# Altium PCB vs1003.PcbDoc (part 2 of 2)
Units mil, origin at the board's own origin, x right, y up, seen from the top; angles counter-clockwise.
Board outline 2510 x 1375 mil, 2 copper layers (Top Layer, Bottom Layer); 54 components, 45 nets, 205 pads, 75 vias.
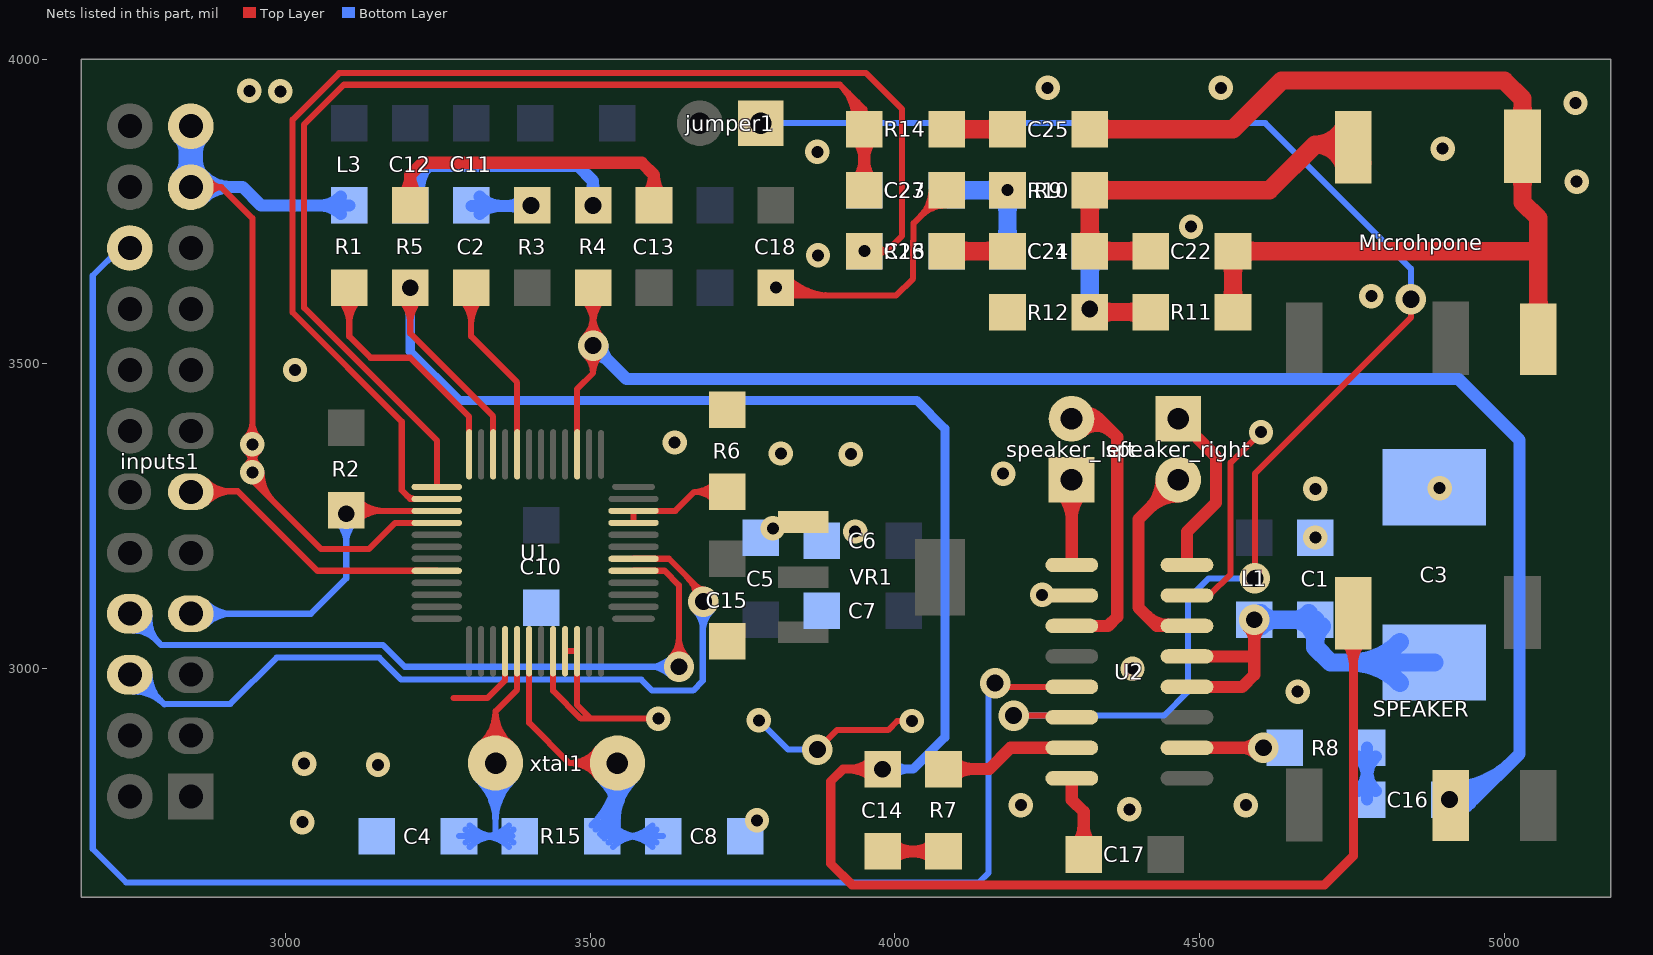
[diagram p2: the nets of this part, all layers, seen from the top]

## Via types
v1: diameter 40, hole 19.68, Top Layer to Bottom Layer, 45 vias
v2: diameter 50, hole 27.56, Top Layer to Bottom Layer, 25 vias
v3: diameter 50, hole 28, Top Layer to Bottom Layer, 5 vias

## Nets (pads, with @x,y where several pads share a name; then routed paths per layer and width w, separated by ;. In a path a pad name is that pad's centre, name@x,y a point inside that pad or via, vN(x,y) a via of type N, cw(c..) or ccw(c..) an arc to the next point about the centre after c; other vN are vias at no path point) (continued)
GND: C1.2 C3.2 C4.1 C5.1 C6.2 C7.1 C8.1 C10.2 C15.2 C18.2 C23.2 C26.1 C27.2 inputs1.21 inputs1.23 L3.1 R6.1 R12.2 U1.4 U1.16 U1.20 U1.21 U1.22 U2.2 U2.15 VR1.2 | length 5102.3
  Top Layer w10: inputs1.21@2845,3790 2895,3790 ; U1.4@3248.58,3239.21 3180.21,3239.21 3137,3196 3059,3196 2946,3309 2946,3739 2895,3790 ; 3276,2952 3332,2952 3360.79,2980.79 U1.16@3360.79,3028.58 ; U1.20@3439.53,3028.58 3439.53,2963.47 3485,2918 3501,2918 ; U1.21@3459.21,3028.58 U1.22@3478.9,3028.58 3478.9,2940.1 3501,2918 ; v1@3601,2918 3501,2918 ; C18.2@3814,3612 4002,3612 4030,3640 4030,3701.13 ; v3(3873,2867) 3905,2899 3989,2899 4004,2914 v1(4028,2914) ; 4030,3663.6 4030,3701.13 ; C27.2@4085,3785 4031,3731 4031,3702.13 4030,3701.13 ; U2.15@4479.49,3120 4516,3120 4551,3155 4551,3338 v1(4601,3388) ; 2895,3790 cw(c2895,3812.21) 2874.7,3803.19 ccw(c2895,3812.21) 2895,3790 ; 2895,3790 ccw(c2895,3767.79) 2874.7,3776.81 cw(c2895,3767.79) 2895,3790 ; v1@2946,3331.79 cw(c2982.21,3331.79) 2956.61,3357.39 ccw(c2982.21,3331.79) v1@2946,3331.79 ; v1@2946,3331.79 ccw(c2909.79,3331.79) 2935.39,3357.39 cw(c2909.79,3331.79) v1@2946,3331.79 ; v1@2946,3358.21 cw(c2909.79,3358.21) 2935.39,3332.61 ccw(c2909.79,3358.21) v1@2946,3358.21 ; v1@2946,3358.21 ccw(c2982.21,3358.21) 2956.61,3332.61 cw(c2982.21,3358.21) v1@2946,3358.21 ; 2946,3404.21 cw(c2909.79,3404.21) 2935.39,3378.61 ccw(c2909.79,3404.21) 2946,3404.21 ; 2946,3404.21 ccw(c2982.21,3404.21) 2956.61,3378.61 cw(c2982.21,3404.21) 2946,3404.21 ; C18.2@3808.54,3628.54 ccw(c3848.46,3668.46) 3848.46,3612 ; C18.2@3808.54,3628.54 ccw(c3848.46,3668.46) 3848.46,3612 ; C18.2@3808.54,3628.54 ccw(c3848.46,3668.46) 3848.46,3612 ; C18.2@3808.54,3628.54 ccw(c3848.46,3668.46) 3848.46,3612 ; C18.2@3815.61,3635.61 ccw(c3872.6,3692.6) 3872.6,3612 ; C18.2@3815.61,3635.61 ccw(c3872.6,3692.6) 3872.6,3612 ; C18.2@3815.61,3635.61 ccw(c3872.6,3692.6) 3872.6,3612 ; C18.2@3815.61,3635.61 ccw(c3872.6,3692.6) 3872.6,3612 ; 4042.32,3742.32 cw(c4085,3699.64) 4085,3760 ccw(c4085,3699.64) 4042.32,3742.32 ; 4042.32,3742.32 ccw(c3999.64,3785) 4060,3785 cw(c3999.64,3785) 4042.32,3742.32 ; C27.2@4059.39,3759.39 cw(c4085,3733.79) 4085,3770 ccw(c4085,3733.79) C27.2@4059.39,3759.39 ; C27.2@4059.39,3759.39 ccw(c4033.79,3785) 4070,3785 cw(c4033.79,3785) C27.2@4059.39,3759.39 ; v1@2951,3322 ccw(c2994.46,3322) 2963.73,3291.27 cw(c2994.46,3322) v1@2951,3322 ; v1@2961,3322 ccw(c3028.6,3322) 2980.8,3274.2 cw(c3028.6,3322) v1@2961,3322 ; C18.2@3801.46,3621.46 ccw(c3824.31,3644.31) 3824.31,3612 cw(c3824.31,3644.31) C18.2@3801.46,3621.46 ; C18.2@3822.68,3607.32 cw(c3833.97,3596.03) 3833.97,3612 ccw(c3833.97,3596.03) C18.2@3822.68,3607.32 ; C18.2@3822.68,3642.68 ccw(c3896.74,3716.74) 3896.74,3612 cw(c3896.74,3716.74) C18.2@3822.68,3642.68
  Bottom Layer w10: v1(3777,2915) 3825,2867 v3(3873,2867)
  Bottom Layer w20: inputs1.21@2845,3790 2930,3790 2960,3760 L3.1@3105,3760 ; 2911.39,3790 cw(c2911.39,3856.39) 2864.45,3809.45 ccw(c2911.39,3856.39) 2911.39,3790 ; 2911.39,3790 ccw(c2911.39,3723.61) 2864.45,3770.55 cw(c2911.39,3723.61) 2911.39,3790 ; 3056.72,3760 cw(c3056.72,3711.72) 3090.86,3745.86 ccw(c3056.72,3711.72) 3056.72,3760 ; 3056.72,3760 ccw(c3056.72,3808.28) 3090.86,3774.14 cw(c3056.72,3808.28) 3056.72,3760
  Bottom Layer w40: inputs1.21@2845,3790 inputs1.23@2845,3890 ; 2845,3832.25 cw(c2802.75,3832.25) 2832.63,3802.37 ccw(c2802.75,3832.25) 2845,3832.25 ; 2845,3832.25 ccw(c2887.25,3832.25) 2857.37,3802.37 cw(c2887.25,3832.25) 2845,3832.25 ; 2845,3847.75 cw(c2887.25,3847.75) 2857.37,3877.63 ccw(c2887.25,3847.75) 2845,3847.75 ; 2845,3847.75 ccw(c2802.75,3847.75) 2832.63,3877.63 cw(c2802.75,3847.75) 2845,3847.75
  other v1: 3028,2748 3774,2751 4385,2769 4207,2776 4576,2776 3152,2842 3031,2844 3612,2918 4661,2962 4390,3000 4242,3121 4690,3215 3935,3225 3800,3230 4690,3295 4894,3296 4178,3320 2946,3322 3928,3352 3813,3353 2946,3368 3639,3371 3016,3490 4782,3611 3805,3625 3874,3678 4486,3725 5119,3799 3873,3848 4899,3853 5117,3928 2992,3947 2941,3948 4251,3953 4535,3953
INL: C14.1 R5.1 SPEAKER.L U1.46 | length 4611.5
  Top Layer w10: v2(3205,3625) 3205,3550 3341.1,3413.9 U1.46@3341.1,3351.42 ; 3205,3564.64 cw(c3265.36,3564.64) 3222.68,3607.32 ccw(c3265.36,3564.64) 3205,3564.64 ; 3205,3564.64 ccw(c3144.64,3564.64) 3187.32,3607.32 cw(c3144.64,3564.64) 3205,3564.64 ; 3205,3576.72 cw(c3253.28,3576.72) 3219.14,3610.86 ccw(c3253.28,3576.72) 3205,3576.72 ; 3205,3576.72 ccw(c3156.72,3576.72) 3190.86,3610.86 cw(c3156.72,3576.72) 3205,3576.72 ; 3205,3588.79 cw(c3241.21,3588.79) 3215.61,3614.39 ccw(c3241.21,3588.79) 3205,3588.79 ; 3205,3588.79 ccw(c3168.79,3588.79) 3194.39,3614.39 cw(c3168.79,3588.79) 3205,3588.79
  Top Layer w15: v2(3980,2835) 3915,2835 3895,2815 3895,2680 3930,2645 4705,2645 4752.44,2692.44 SPEAKER.L@4752.44,3061 ; 3925.68,2835 cw(c3925.68,2780.68) 3964.09,2819.09 ccw(c3925.68,2780.68) 3925.68,2835 ; 3925.68,2835 ccw(c3925.68,2889.32) 3964.09,2850.91 cw(c3925.68,2889.32) 3925.68,2835 ; 3937.75,2835 cw(c3937.75,2792.75) 3967.63,2822.63 ccw(c3937.75,2792.75) 3937.75,2835 ; 3937.75,2835 ccw(c3937.75,2877.25) 3967.63,2847.37 cw(c3937.75,2877.25) 3937.75,2835 ; 4752.44,3006.68 cw(c4806.76,3006.68) 4768.35,3045.09 ccw(c4806.76,3006.68) 4752.44,3006.68 ; 4752.44,3006.68 ccw(c4698.12,3006.68) 4736.53,3045.09 cw(c4698.12,3006.68) 4752.44,3006.68
  Bottom Layer w15: v2@3192.63,3612.63 cw(c3162.75,3582.75) 3205,3582.75 cw(c3247.25,3582.75) v2@3217.37,3612.63 ; v2(3205,3625) 3205,3520 3285,3440 4036,3440 4082.22,3393.78 4082.22,2887.22 4030,2835 v2(3980,2835) ; 4022.25,2835 cw(c4022.25,2877.25) 3992.37,2847.37 ccw(c4022.25,2877.25) 4022.25,2835 ; 4022.25,2835 ccw(c4022.25,2792.75) 3992.37,2822.63 cw(c4022.25,2792.75) 4022.25,2835
INR: C16.2 R4.1 SPEAKER.R U1.39 | length 3919.5
  Top Layer w10: U1.39@3478.9,3351.42 3478.9,3400 3478.9,3458.9 3505,3485 ; R4.1@3505,3625 v2(3505,3530) 3505,3485 ; 3505,3485 cw(c3545.62,3485) 3518.4,3515.15 ccw(c3545.62,3485) 3505,3485 ; 3505,3485 ccw(c3464.38,3485) 3491.6,3515.15 cw(c3464.38,3485) 3505,3485 ; 3505,3564.64 cw(c3565.36,3564.64) 3522.68,3607.32 ccw(c3565.36,3564.64) 3505,3564.64 ; 3505,3564.64 ccw(c3444.64,3564.64) 3487.32,3607.32 cw(c3444.64,3564.64) 3505,3564.64 ; 3505,3578.28 cw(c3456.72,3578.28) 3490.86,3544.14 ccw(c3456.72,3578.28) 3505,3578.28 ; 3505,3578.28 ccw(c3553.28,3578.28) 3519.14,3544.14 cw(c3553.28,3578.28) 3505,3578.28 ; 3505,3588.79 cw(c3541.21,3588.79) 3515.61,3614.39 ccw(c3541.21,3588.79) 3505,3588.79 ; 3505,3588.79 ccw(c3468.79,3588.79) 3494.39,3614.39 cw(c3468.79,3588.79) 3505,3588.79
  Top Layer w20: v2@3505,3525 v2(3505,3530)
  Bottom Layer w20: v2(3505,3530) 3560,3475 4925,3475 5025,3375 5025,2860 4950,2785 ; 3530.61,3504.39 cw(c3556.21,3530) 3520,3530 ccw(c3556.21,3530) 3530.61,3504.39 ; 3530.61,3504.39 ccw(c3505,3478.79) 3505,3515 cw(c3505,3478.79) 3530.61,3504.39 ; v2(4910,2785) ccw(c4910,2881.57) 4978.28,2813.28 cw(c4910,2881.57) v2(4910,2785) ; v2(4910,2785) 4950,2785 ; 4946.21,2785 cw(c4946.21,2821.21) 4920.61,2795.61 ccw(c4946.21,2821.21) 4946.21,2785 ; 4946.21,2785 ccw(c4946.21,2748.79) 4920.61,2774.39 cw(c4946.21,2748.79) 4946.21,2785 ; 4950,2785 cw(c4950,2815) 4926,2797 ccw(c4950,2815) 4950,2785 ; 4950,2785 ccw(c4950,2755) 4926,2773 cw(c4950,2755) 4950,2785 ; C16.2@4910,2765 ccw(c4910,2813.28) 4944.14,2779.14 cw(c4910,2813.28) C16.2@4910,2765 ; C16.2@4910,2805 ccw(c4910,2949.85) 5012.43,2847.43 cw(c4910,2949.85) C16.2@4910,2805
MICN: C26.2 R13.1 U1.2 | length 2293.8
  Top Layer w10: U1.2@3248.58,3278.58 3205.06,3278.58 3191,3292.64 3191,3405.26 3012,3584.26 3012,3900.74 3088.26,3977 3953,3977 4012,3918 4012,3710 3987,3685 ; v1(3950,3685) 3987,3685 ; 3986.21,3685 cw(c3986.21,3721.21) 3960.61,3695.61 ccw(c3986.21,3721.21) 3986.21,3685 ; 3986.21,3685 ccw(c3986.21,3648.79) 3960.61,3674.39 cw(c3986.21,3648.79) 3986.21,3685 ; 3987,3685 cw(c3987,3699.88) 3973.19,3694.33 ccw(c3987,3699.88) 3987,3685 ; 3987,3685 ccw(c3987,3670.12) 3973.19,3675.67 cw(c3987,3670.12) 3987,3685 ; 3199.98,3283.66 ccw(c3212.24,3295.93) 3212.24,3278.58 cw(c3212.24,3295.93) 3199.98,3283.66
MICP: C27.1 R14.1 U1.1 | length 2331.9
  Top Layer w10: U1.1@3248.58,3298.27 3248.58,3374.55 3031,3592.13 3031,3892.87 3096.13,3958 3910,3958 ; 3923.71,3944.29 cw(c3871.53,3892.11) R14.1@3945.02,3885.45 ; R14.1@3934.55,3890.22 ccw(c3849.9,3897.9) 3910,3958 ; 3938.81,3929.19 cw(c3899.22,3889.6) R14.1@3954.98,3884.55 ; R14.1@3950,3885 3950,3890 3950,3918 ; 3910,3958 3950,3918 ; 3950,3918 cw(c3940.72,3918) 3943.23,3909.07 ccw(c3940.72,3918) 3950,3918 ; 3950,3918 ccw(c3959.28,3918) 3956.77,3909.07 cw(c3959.28,3918) 3950,3918
  Top Layer w20: C27.1@3950,3785 R14.1@3950,3885 3950,3890 R14.1@3955,3895 ; 3950,3833.28 cw(c3901.72,3833.28) 3935.86,3799.14 ccw(c3901.72,3833.28) 3950,3833.28 ; 3950,3833.28 ccw(c3998.28,3833.28) 3964.14,3799.14 cw(c3998.28,3833.28) 3950,3833.28 ; 3950,3836.72 cw(c3998.28,3836.72) 3964.14,3870.86 ccw(c3998.28,3836.72) 3950,3836.72 ; 3950,3836.72 ccw(c3901.72,3836.72) 3935.86,3870.86 cw(c3901.72,3836.72) 3950,3836.72
MUTE: inputs1.20 U2.5 | length 2981.9
  Top Layer w10: v3(4164.56,2976) 4170.56,2970 U2.5@4290.51,2970
  Bottom Layer w10: inputs1.20@2745,3690 2729,3690 2684,3645 2684,2704 2739,2649 4138,2649 4154,2665 4154,2971 4167,2984 4167,2978.44 v3(4164.56,2976)
NetC2_1: C2.1 U1.44 | length 608.2
  Top Layer w10: C2.1@3305,3625 3305,3545 3380.47,3469.53 U1.44@3380.47,3351.42 ; 3305,3564.64 cw(c3365.36,3564.64) 3322.68,3607.32 ccw(c3365.36,3564.64) 3305,3564.64 ; 3305,3564.64 ccw(c3244.64,3564.64) 3287.32,3607.32 cw(c3244.64,3564.64) 3305,3564.64 ; 3305,3588.79 cw(c3341.21,3588.79) 3315.61,3614.39 ccw(c3341.21,3588.79) 3305,3588.79 ; 3305,3588.79 ccw(c3268.79,3588.79) 3294.39,3614.39 cw(c3268.79,3588.79) 3305,3588.79
NetC4_2: C4.2 R15.1 U1.17 xtal1.2 | length 1569.1
  Top Layer w10: xtal1.2@3319.49,2876.17 ccw(c3275.46,2929.99) 3345,2929.99 ; xtal1.2@3325.82,2868.43 ccw(c3292.72,2908.89) 3345,2908.89 ccw(c3397.27,2908.89) xtal1.2@3364.17,2868.43 ; xtal1.2@3345,2845 3345,2930 ; xtal1.2@3370.5,2876.17 cw(c3414.54,2929.99) 3345,2929.99 ; U1.17@3380.47,3028.58 3380.47,2965.47 3345,2930
  Bottom Layer w10: C4.2@3285,2725 R15.1@3373,2725 ; xtal1.2@3316.52,2816.52 cw(c3247.76,2747.77) 3345,2747.77 cw(c3442.23,2747.77) xtal1.2@3373.48,2816.52 ; xtal1.2@3323.59,2823.59 cw(c3271.9,2771.91) 3345,2771.91 cw(c3418.09,2771.91) xtal1.2@3366.4,2823.59 ; xtal1.2@3330.66,2830.66 cw(c3296.05,2796.05) 3345,2796.05 cw(c3393.95,2796.05) xtal1.2@3359.33,2830.66 ; 3345,2729 xtal1.2@3345,2845 ; 3321.21,2725 cw(c3321.21,2761.21) 3295.61,2735.61 ccw(c3321.21,2761.21) 3321.21,2725 ; 3321.21,2725 ccw(c3321.21,2688.79) 3295.61,2714.39 cw(c3321.21,2688.79) 3321.21,2725 ; 3324.64,2725 cw(c3324.64,2664.64) 3367.32,2707.32 ccw(c3324.64,2664.64) 3324.64,2725 ; 3324.64,2725 ccw(c3324.64,2785.36) 3367.32,2742.68 cw(c3324.64,2785.36) 3324.64,2725 ; 3345.36,2725 cw(c3345.36,2785.36) 3302.68,2742.68 ccw(c3345.36,2785.36) 3345.36,2725 ; 3345.36,2725 ccw(c3345.36,2664.64) 3302.68,2707.32 cw(c3345.36,2664.64) 3345.36,2725 ; 3348.79,2725 cw(c3348.79,2688.79) 3374.39,2714.39 ccw(c3348.79,2688.79) 3348.79,2725 ; 3348.79,2725 ccw(c3348.79,2761.21) 3374.39,2735.61 cw(c3348.79,2761.21) 3348.79,2725
NetC8_2: C8.2 R15.2 U1.18 xtal1.1 | length 2031.8
  Top Layer w10: U1.18@3400.16,3028.58 3400.16,2910.84 3466,2845 ; xtal1.1@3512.4,2821.34 ccw(c3466,2787.67) 3466,2845 ; xtal1.1@3512.4,2868.66 cw(c3466,2902.33) 3466,2845 ; xtal1.1@3520.49,2827.22 ccw(c3485.62,2801.91) 3485.62,2845 ccw(c3485.62,2888.09) xtal1.1@3520.49,2862.78 ; xtal1.1@3545,2845 3466,2845
  Bottom Layer w10: R15.2@3502.4,2742.75 ccw(c3401,2844.99) xtal1.1@3545,2845 3545,2727 R15.2@3543,2725 ; R15.2@3509.44,2735.65 ccw(c3424.81,2820.99) xtal1.1@3545,2820.99 ; R15.2@3516.48,2728.55 ccw(c3448.61,2796.99) 3545,2796.99 ; xtal1.1@3516.52,2816.52 cw(c3447.76,2747.77) 3545,2747.77 cw(c3642.23,2747.77) xtal1.1@3573.48,2816.52 ; R15.2@3520,2725 R15.2@3543,2725 ; R15.2@3523.52,2721.45 ccw(c3472.41,2772.99) 3545,2772.99 ; xtal1.1@3523.59,2823.59 cw(c3471.9,2771.91) 3545,2771.91 cw(c3618.09,2771.91) xtal1.1@3566.4,2823.59 ; R15.2@3530.56,2714.35 ccw(c3496.21,2748.99) R15.2@3545,2748.99 ; xtal1.1@3530.66,2830.66 cw(c3496.05,2796.05) 3545,2796.05 cw(c3593.95,2796.05) xtal1.1@3559.33,2830.66 ; C8.2@3620,2725 R15.2@3543,2725 ; 3556.21,2725 cw(c3556.21,2761.21) 3530.61,2735.61 ccw(c3556.21,2761.21) 3556.21,2725 ; 3556.21,2725 ccw(c3556.21,2688.79) 3530.61,2714.39 cw(c3556.21,2688.79) 3556.21,2725 ; 3559.64,2725 cw(c3559.64,2664.64) 3602.32,2707.32 ccw(c3559.64,2664.64) 3559.64,2725 ; 3559.64,2725 ccw(c3559.64,2785.36) 3602.32,2742.68 cw(c3559.64,2785.36) 3559.64,2725 ; 3580.36,2725 cw(c3580.36,2785.36) 3537.68,2742.68 ccw(c3580.36,2785.36) 3580.36,2725 ; 3580.36,2725 ccw(c3580.36,2664.64) 3537.68,2707.32 cw(c3580.36,2664.64) 3580.36,2725 ; 3583.79,2725 cw(c3583.79,2688.79) 3609.39,2714.39 ccw(c3583.79,2688.79) 3583.79,2725 ; 3583.79,2725 ccw(c3583.79,2761.21) 3609.39,2735.61 cw(c3583.79,2761.21) 3583.79,2725
NetC9_1: 
NetC11_1: C11.1 R3.1 | length 366.3
  Top Layer w10: v2(3403,3760) R3.1@3405,3760
  Bottom Layer w10: C11.1@3305,3760 C11.1@3306,3759 ; v2@3402,3759 v2(3403,3760)
  Bottom Layer w20: C11.1@3306,3759 v2@3402,3759 ; C11.1@3319.14,3745.86 cw(c3350.87,3714.13) 3350.87,3759 ccw(c3350.87,3714.13) C11.1@3319.14,3745.86 ; C11.1@3319.14,3774.14 ccw(c3355.7,3810.7) 3355.7,3759 cw(c3355.7,3810.7) C11.1@3319.14,3774.14 ; 3364.37,3759 ccw(c3364.37,3798.63) 3392.39,3770.61 cw(c3364.37,3798.63) 3364.37,3759 ; 3369.2,3759 cw(c3369.2,3726.2) 3392.39,3749.39 ccw(c3369.2,3726.2) 3369.2,3759
NetC12_1: C12.1 R4.2 | length 815.9
  Bottom Layer w20: v2(3505,3760) 3505,3800 3480,3825 3235,3825 ; C12.1@3205,3760 cw(c3242.24,3775.3) 3213.77,3803.77 ccw(c3242.24,3775.3) C12.1@3205,3760 ; C12.1@3205,3760 3205,3795 ; 3205,3795 cw(c3184.38,3795) 3194.85,3777.23 ccw(c3184.38,3795) 3205,3795 ; 3205,3795 ccw(c3225.62,3795) 3215.15,3777.23 cw(c3225.62,3795) 3205,3795 ; 3205,3795 3235,3825 ; 3235,3825 ccw(c3272.33,3787.67) 3223.5,3767.6 cw(c3272.33,3787.67) 3235,3825 ; 3505,3796.21 cw(c3468.79,3796.21) 3494.39,3770.61 ccw(c3468.79,3796.21) 3505,3796.21 ; 3505,3796.21 ccw(c3541.21,3796.21) 3515.61,3770.61 cw(c3541.21,3796.21) 3505,3796.21
NetC13_1: C13.1 R5.2 | length 829.9
  Top Layer w20: R5.2@3205,3760 3205,3810 3225,3830 3585,3830 3605,3810 C13.1@3605,3760 C13.1@3615,3760 ; 3205,3808.28 cw(c3156.72,3808.28) 3190.86,3774.14 ccw(c3156.72,3808.28) 3205,3808.28 ; 3205,3808.28 ccw(c3253.28,3808.28) 3219.14,3774.14 cw(c3253.28,3808.28) 3205,3808.28 ; 3605,3808.28 cw(c3556.72,3808.28) 3590.86,3774.14 ccw(c3556.72,3808.28) 3605,3808.28 ; 3605,3808.28 ccw(c3653.28,3808.28) 3619.14,3774.14 cw(c3653.28,3808.28) 3605,3808.28
NetC14_2: C14.2 R7.2 | length 403.4
  Top Layer w20: C14.2@3980,2700 R7.2@4080,2700 ; 4028.28,2700 cw(c4028.28,2748.28) 3994.14,2714.14 ccw(c4028.28,2748.28) 4028.28,2700 ; 4028.28,2700 ccw(c4028.28,2651.72) 3994.14,2685.86 cw(c4028.28,2651.72) 4028.28,2700 ; 4031.72,2700 cw(c4031.72,2651.72) 4065.86,2685.86 ccw(c4031.72,2651.72) 4031.72,2700 ; 4031.72,2700 ccw(c4031.72,2748.28) 4065.86,2714.14 cw(c4031.72,2748.28) 4031.72,2700
NetC16_1: C16.1 R8.1 | length 388.4
  Bottom Layer w20: C16.1@4775,2785 R8.1@4775,2870 ; 4775,2821.72 cw(c4823.28,2821.72) 4789.14,2855.86 ccw(c4823.28,2821.72) 4775,2821.72 ; 4775,2821.72 ccw(c4726.72,2821.72) 4760.86,2855.86 cw(c4726.72,2821.72) 4775,2821.72 ; 4775,2833.28 cw(c4726.72,2833.28) 4760.86,2799.14 ccw(c4726.72,2833.28) 4775,2833.28 ; 4775,2833.28 ccw(c4823.28,2833.28) 4789.14,2799.14 cw(c4823.28,2833.28) 4775,2833.28
NetC17_2: C17.2 U2.8 | length 284.8
  Top Layer w20: U2.8@4290.51,2820 4290.51,2784.49 4310,2765 C17.2@4310,2695 ; 4310,2743.28 cw(c4261.72,2743.28) 4295.86,2709.14 ccw(c4261.72,2743.28) 4310,2743.28 ; 4310,2743.28 ccw(c4358.28,2743.28) 4324.14,2709.14 cw(c4358.28,2743.28) 4310,2743.28
NetC21_1: C21.1 C23.1 R9.2 R10.1 | length 882.6
  Bottom Layer w30: C23.1@4085,3785 4125,3785 v1(4185,3785) C21.1@4185,3685 ; C23.1@4095.61,3774.39 cw(c4121.21,3748.79) 4121.21,3785 ; C23.1@4095.61,3774.39 cw(c4121.21,3748.79) 4121.21,3785 ; C23.1@4095.61,3774.39 cw(c4121.21,3748.79) 4121.21,3785 ; C23.1@4095.61,3774.39 cw(c4121.21,3748.79) 4121.21,3785 ; C23.1@4095.61,3774.39 cw(c4121.21,3748.79) 4121.21,3785 ; C23.1@4095.61,3774.39 cw(c4121.21,3748.79) 4121.21,3785 ; C23.1@4095.61,3795.61 ccw(c4121.21,3821.21) 4121.21,3785 ; C23.1@4095.61,3795.61 ccw(c4121.21,3821.21) 4121.21,3785 ; C23.1@4095.61,3795.61 ccw(c4121.21,3821.21) 4121.21,3785 ; C23.1@4095.61,3795.61 ccw(c4121.21,3821.21) 4121.21,3785 ; C23.1@4095.61,3795.61 ccw(c4121.21,3821.21) 4121.21,3785 ; C23.1@4095.61,3795.61 ccw(c4121.21,3821.21) 4121.21,3785 ; 4148.79,3785 cw(c4148.79,3748.79) R9.2@4174.39,3774.39 ; 4148.79,3785 ccw(c4148.79,3821.21) 4174.39,3795.61 cw(c4148.79,3821.21) 4148.79,3785 ; 4148.79,3785 cw(c4148.79,3748.79) R9.2@4174.39,3774.39 ; R9.2@4174.39,3774.39 cw(c4148.79,3748.79) 4185,3748.79 ; R9.2@4174.39,3774.39 cw(c4148.79,3748.79) 4185,3748.79 ; 4185,3721.21 cw(c4148.79,3721.21) 4174.39,3695.61 ccw(c4148.79,3721.21) 4185,3721.21 ; 4185,3721.21 ccw(c4221.21,3721.21) 4195.61,3695.61 cw(c4221.21,3721.21) 4185,3721.21 ; 4185,3748.79 cw(c4221.21,3748.79) 4195.61,3774.39 ccw(c4221.21,3748.79) 4185,3748.79
NetC21_2: C21.2 R11.2 R12.1 | length 606
  Top Layer w30: v2(4320,3590) R12.1@4320,3585 R11.2@4420,3585 ; 4356.21,3585 cw(c4356.21,3626.21) 4327.07,3597.07 ccw(c4356.21,3626.21) 4356.21,3585 ; 4356.21,3585 cw(c4356.21,3621.21) 4330.61,3595.61 ccw(c4356.21,3621.21) 4356.21,3585 ; 4356.21,3585 ccw(c4356.21,3548.79) 4330.61,3574.39 cw(c4356.21,3548.79) 4356.21,3585 ; 4383.79,3585 cw(c4383.79,3548.79) 4409.39,3574.39 ccw(c4383.79,3548.79) 4383.79,3585 ; 4383.79,3585 ccw(c4383.79,3621.21) 4409.39,3595.61 cw(c4383.79,3621.21) 4383.79,3585
  Bottom Layer w30: v2(4320,3590) C21.2@4320,3685 ; 4320,3648.79 cw(c4356.21,3648.79) 4330.61,3674.39 ccw(c4356.21,3648.79) 4320,3648.79 ; 4320,3648.79 ccw(c4283.79,3648.79) 4309.39,3674.39 cw(c4283.79,3648.79) 4320,3648.79
NetC22_1: C22.1 C24.1 Microhpone.L R10.2 | length 1606
  Top Layer w30: C24.1@4310,3680 C24.1@4320,3690 ; C22.1@4420,3685 4325,3685 C24.1@4320,3690 ; Microhpone.L@4755,3860 4690,3860 ; C24.1@4320,3690 R10.2@4320,3785 4615,3785 4690,3860 ; 4320,3721.21 cw(c4283.79,3721.21) 4309.39,3695.61 ccw(c4283.79,3721.21) 4320,3721.21 ; 4320,3721.21 ccw(c4356.21,3721.21) C24.1@4330.61,3695.61 ; 4320,3721.21 ccw(c4356.21,3721.21) C24.1@4330.61,3695.61 ; 4320,3748.79 cw(c4356.21,3748.79) R10.2@4330.61,3774.39 ; 4320,3748.79 ccw(c4283.79,3748.79) 4309.39,3774.39 cw(c4283.79,3748.79) 4320,3748.79 ; 4320,3748.79 cw(c4356.21,3748.79) R10.2@4330.61,3774.39 ; C24.1@4330.61,3695.61 ccw(c4356.21,3721.21) 4356.21,3685 ; C24.1@4330.61,3695.61 ccw(c4356.21,3721.21) 4356.21,3685 ; R10.2@4330.61,3774.39 cw(c4356.21,3748.79) 4356.21,3785 ; R10.2@4330.61,3774.39 cw(c4356.21,3748.79) 4356.21,3785 ; 4356.21,3685 ccw(c4356.21,3648.79) 4330.61,3674.39 cw(c4356.21,3648.79) 4356.21,3685 ; 4356.21,3785 cw(c4356.21,3821.21) 4330.61,3795.61 ccw(c4356.21,3821.21) 4356.21,3785 ; 4383.79,3685 cw(c4383.79,3648.79) 4409.39,3674.39 ccw(c4383.79,3648.79) 4383.79,3685 ; 4383.79,3685 ccw(c4383.79,3721.21) 4409.39,3695.61 cw(c4383.79,3721.21) 4383.79,3685 ; 4690,3860 ccw(c4690,3913.73) 4738.81,3891.27 cw(c4690,3913.73) 4690,3860 ; 4690,3860 cw(c4690,3810.72) 4737.87,3822.43 ccw(c4690,3810.72) 4690,3860 ; Microhpone.L@4728.23,3860 cw(c4728.23,3820.07) 4767.01,3829.57 ccw(c4728.23,3820.07) Microhpone.L@4728.23,3860
NetC22_2: C22.2 C25.1 Microhpone.G R11.1 | length 3019.8
  Top Layer w30: C25.1@4320,3885 4555,3885 4635,3965 4900,3965 5000,3965 5030,3935 Microhpone.G@5030,3887 ; R11.1@4555,3585 C22.2@4555,3685 5030,3685 5056,3685 ; Microhpone.G@5030,3865 Microhpone.G@5030,3827 5030,3765 5056,3739 5056,3685 ; Microhpone.G@5056,3512 Microhpone.G@5056,3569 5056,3685 ; 4356.21,3885 cw(c4356.21,3921.21) 4330.61,3895.61 ccw(c4356.21,3921.21) 4356.21,3885 ; 4356.21,3885 ccw(c4356.21,3848.79) 4330.61,3874.39 cw(c4356.21,3848.79) 4356.21,3885 ; 4555,3621.21 cw(c4518.79,3621.21) 4544.39,3595.61 ccw(c4518.79,3621.21) 4555,3621.21 ; 4555,3621.21 ccw(c4591.21,3621.21) 4565.61,3595.61 cw(c4591.21,3621.21) 4555,3621.21 ; 4555,3648.79 cw(c4591.21,3648.79) C22.2@4565.61,3674.39 ; 4555,3648.79 ccw(c4518.79,3648.79) 4544.39,3674.39 cw(c4518.79,3648.79) 4555,3648.79 ; 4555,3648.79 cw(c4591.21,3648.79) C22.2@4565.61,3674.39 ; C22.2@4565.61,3674.39 cw(c4591.21,3648.79) 4591.21,3685 ; C22.2@4565.61,3674.39 cw(c4591.21,3648.79) 4591.21,3685 ; 4591.21,3685 cw(c4591.21,3721.21) 4565.61,3695.61 ccw(c4591.21,3721.21) 4591.21,3685 ; 5030,3790.79 cw(c5066.21,3790.79) 5040.61,3816.39 ccw(c5066.21,3790.79) 5030,3790.79 ; 5030,3790.79 ccw(c4993.79,3790.79) 5019.39,3816.39 cw(c4993.79,3790.79) 5030,3790.79 ; Microhpone.G@5030,3850.79 cw(c5066.21,3850.79) 5040.61,3876.39 ccw(c5066.21,3850.79) Microhpone.G@5030,3850.79 ; Microhpone.G@5030,3850.79 ccw(c4993.79,3850.79) 5019.39,3876.39 cw(c4993.79,3850.79) Microhpone.G@5030,3850.79 ; Microhpone.G@5030,3863.21 cw(c4993.79,3863.21) 5019.39,3837.61 ccw(c4993.79,3863.21) Microhpone.G@5030,3863.21 ; Microhpone.G@5030,3863.21 ccw(c5066.21,3863.21) 5040.61,3837.61 cw(c5066.21,3863.21) Microhpone.G@5030,3863.21 ; 5030,3923.21 cw(c4993.79,3923.21) 5019.39,3897.61 ccw(c4993.79,3923.21) 5030,3923.21 ; 5030,3923.21 ccw(c5066.21,3923.21) 5040.61,3897.61 cw(c5066.21,3923.21) 5030,3923.21 ; Microhpone.G@5056,3532.79 cw(c5092.21,3532.79) 5066.61,3558.39 ccw(c5092.21,3532.79) Microhpone.G@5056,3532.79 ; Microhpone.G@5056,3532.79 ccw(c5019.79,3532.79) 5045.39,3558.39 cw(c5019.79,3532.79) Microhpone.G@5056,3532.79 ; Microhpone.G@5056,3548.21 cw(c5019.79,3548.21) 5045.39,3522.61 ccw(c5019.79,3548.21) Microhpone.G@5056,3548.21 ; Microhpone.G@5056,3548.21 ccw(c5092.21,3548.21) 5066.61,3522.61 cw(c5092.21,3548.21) Microhpone.G@5056,3548.21 ; 5056,3605.21 cw(c5019.79,3605.21) 5045.39,3579.61 ccw(c5019.79,3605.21) 5056,3605.21 ; 5056,3605.21 ccw(c5092.21,3605.21) 5066.61,3579.61 cw(c5092.21,3605.21) 5056,3605.21
NetC24_2: C24.2 R13.2 | length 327.5
  Top Layer w30: R13.2@4085,3685 C24.2@4185,3685 ; 4121.21,3685 cw(c4121.21,3721.21) 4095.61,3695.61 ccw(c4121.21,3721.21) 4121.21,3685 ; 4121.21,3685 ccw(c4121.21,3648.79) 4095.61,3674.39 cw(c4121.21,3648.79) 4121.21,3685 ; 4148.79,3685 cw(c4148.79,3648.79) 4174.39,3674.39 ccw(c4148.79,3648.79) 4148.79,3685 ; 4148.79,3685 ccw(c4148.79,3721.21) 4174.39,3695.61 cw(c4148.79,3721.21) 4148.79,3685
NetC25_2: C25.2 R14.2 | length 327.5
  Top Layer w30: R14.2@4085,3885 C25.2@4185,3885 ; 4121.21,3885 cw(c4121.21,3921.21) 4095.61,3895.61 ccw(c4121.21,3921.21) 4121.21,3885 ; 4121.21,3885 ccw(c4121.21,3848.79) 4095.61,3874.39 cw(c4121.21,3848.79) 4121.21,3885 ; 4148.79,3885 cw(c4148.79,3848.79) 4174.39,3874.39 ccw(c4148.79,3848.79) 4148.79,3885 ; 4148.79,3885 ccw(c4148.79,3921.21) 4174.39,3895.61 cw(c4148.79,3921.21) 4148.79,3885
NetR1_2: R1.2 U1.48 | length 696.5
  Top Layer w10: R1.2@3105,3625 3105,3545 3140,3510 3205,3510 3301.73,3413.27 U1.48@3301.73,3351.42 ; 3105,3564.64 cw(c3165.36,3564.64) 3122.68,3607.32 ccw(c3165.36,3564.64) 3105,3564.64 ; 3105,3564.64 ccw(c3044.64,3564.64) 3087.32,3607.32 cw(c3044.64,3564.64) 3105,3564.64 ; 3105,3588.79 cw(c3141.21,3588.79) 3115.61,3614.39 ccw(c3141.21,3588.79) 3105,3588.79 ; 3105,3588.79 ccw(c3068.79,3588.79) 3094.39,3614.39 cw(c3068.79,3588.79) 3105,3588.79
NetR6_2: R6.2 U1.33 U1.34 | length 439.6
  Top Layer w10: U1.33@3571.42,3239.21 U1.34@3571.42,3258.9 3640,3258.9 3671.1,3290 ; R6.2@3725,3290 3671.1,3290 ; 3671.11,3290 cw(c3671.11,3244.41) 3705.91,3273.85 ccw(c3671.11,3244.41) 3671.11,3290 ; 3671.11,3290 ccw(c3671.11,3335.59) 3705.91,3306.15 cw(c3671.11,3335.59) 3671.11,3290 ; 3692.66,3290 cw(c3692.66,3262.64) 3713.55,3280.31 ccw(c3692.66,3262.64) 3692.66,3290 ; 3692.66,3290 ccw(c3692.66,3317.36) 3713.55,3299.69 cw(c3692.66,3317.36) 3692.66,3290
NetR7_1: R7.1 U2.7 | length 376.7
  Top Layer w20: R7.1@4080,2835 4155,2835 4190,2870 U2.7@4290.51,2870 ; 4128.28,2835 cw(c4128.28,2883.28) 4094.14,2849.14 ccw(c4128.28,2883.28) 4128.28,2835 ; 4128.28,2835 ccw(c4128.28,2786.72) 4094.14,2820.86 cw(c4128.28,2786.72) 4128.28,2835
NetR8_2: R8.2 U2.10 | length 239.3
  Top Layer w20: U2.10@4479.49,2870 v2(4605,2870) ; 4568.79,2870 cw(c4568.79,2833.79) 4594.39,2859.39 ccw(c4568.79,2833.79) 4568.79,2870 ; 4568.79,2870 ccw(c4568.79,2906.21) 4594.39,2880.61 cw(c4568.79,2906.21) 4568.79,2870
OL+: speaker_left.1 U2.1 | length 244.5
  Top Layer w20: speaker_left.1@4270.55,3290.55 cw(c4222.37,3242.37) 4290.51,3242.37 ; speaker_left.1@4290,3310 4290.51,3309.49 U2.1@4290.51,3170 ; 4290.51,3244.85 cw(c4355.15,3244.85) speaker_left.1@4309.45,3290.55
OL-: speaker_left.2 U2.3 | length 908.3
  Top Layer w20: speaker_left.2@4287.1,3422.16 cw(c4299.42,3370.57) 4336.93,3408.07 ; speaker_left.2@4290,3410 4335,3410 ; U2.3@4290.51,3070 4350,3070 4365,3085 4365,3380 4335,3410 ; speaker_left.2@4291.74,3402.71 cw(c4309.17,3329.75) 4362.21,3382.79 ; 4335,3410 cw(c4335,3433.07) 4314.47,3422.54 ccw(c4335,3433.07) 4335,3410 ; 4335,3410 ccw(c4335,3386.93) 4314.47,3397.46 cw(c4335,3386.93) 4335,3410 ; speaker_left.2@4294.92,3404.34 cw(c4317.73,3378.07) 4342.33,3402.67 ccw(c4317.73,3378.07) speaker_left.2@4294.92,3404.34 ; speaker_left.2@4308.03,3389.24 cw(c4331.83,3361.84) 4357.5,3387.5 ccw(c4331.83,3361.84) speaker_left.2@4308.03,3389.24
OR+: speaker_right.1 U2.16 | length 285.4
  Top Layer w20: speaker_right.1@4465,3410 4527,3348 4527,3272 4479.49,3224.49 U2.16@4479.49,3170
OR-: speaker_right.2 U2.14 | length 470.7
  Top Layer w20: 4414.19,3085.81 ccw(c4447.99,3119.62) U2.14@4447.99,3071.81 ; speaker_right.2@4437.5,3310 cw(c4371.11,3310) 4418.05,3263.05 cw(c4465,3216.11) speaker_right.2@4465,3282.5 ; speaker_right.2@4465,3310 4400,3245 4400,3100 4430,3070 U2.14@4479.49,3070
PAM_VDD: jumper1.1 U2.6 | length 2455
  Top Layer w10: v3(4195,2923) 4287.51,2923 U2.6@4290.51,2920 ; v3(4591,3148) 4591,3320 4847,3576 v3(4847,3606)
  Bottom Layer w10: jumper1.1@3780,3895 4608,3895 4847,3656 v3(4847,3606) ; v3(4195,2923) 4442,2923 4481,2962 4481,3114 4515,3148 v3(4591,3148)
REQ: inputs1.11 U1.8 | length 601.3
  Top Layer w10: inputs1.11@2853,3291 2922,3291 3052.53,3160.47 U1.8@3248.58,3160.47 ; inputs1.11@2863.11,3279.39 cw(c2891.13,3251.37) 2891.13,3291 ; inputs1.11@2863.11,3300.61 ccw(c2886.3,3323.8) 2886.3,3291 ; inputs1.11@2870.18,3272.32 cw(c2915.27,3227.23) 2915.27,3291 ; inputs1.11@2870.18,3307.68 ccw(c2910.44,3347.94) 2910.44,3291
RESET: inputs1.7 R2.2 U1.3 | length 1504.4
  Top Layer w10: v2(3100,3254) R2.2@3100,3260 ; R2.2@3110,3260 3111.1,3258.9 U1.3@3248.58,3258.9 ; R2.2@3107.07,3246.93 cw(c3135.97,3218.03) 3135.97,3258.9 ccw(c3135.97,3218.03) R2.2@3107.07,3246.93 ; R2.2@3110.61,3249.39 cw(c3133.55,3226.45) 3133.55,3258.9 ccw(c3133.55,3226.45) R2.2@3110.61,3249.39 ; R2.2@3110.61,3270.61 ccw(c3138.87,3298.87) 3138.87,3258.9 cw(c3138.87,3298.87) R2.2@3110.61,3270.61 ; R2.2@3114.14,3239.86 cw(c3160.11,3193.89) 3160.11,3258.9 ccw(c3160.11,3193.89) R2.2@3114.14,3239.86 ; R2.2@3114.14,3268.14 ccw(c3136.46,3290.46) 3136.46,3258.9 cw(c3136.46,3290.46) R2.2@3114.14,3268.14 ; R2.2@3117.68,3242.32 cw(c3157.69,3202.31) 3157.69,3258.9 ccw(c3157.69,3202.31) R2.2@3117.68,3242.32 ; R2.2@3117.68,3277.68 ccw(c3163.02,3323.02) 3163.02,3258.9 cw(c3163.02,3323.02) R2.2@3117.68,3277.68
  Bottom Layer w10: inputs1.7@2845,3090 3042,3090 3100,3148 v2(3100,3254) ; 2888.71,3090 cw(c2888.71,3126.21) 2863.11,3100.61 ccw(c2888.71,3126.21) 2888.71,3090 ; 2888.71,3090 ccw(c2888.71,3053.79) 2863.11,3079.39 cw(c2888.71,3053.79) 2888.71,3090 ; 2912.86,3090 cw(c2912.86,3150.36) 2870.18,3107.68 ccw(c2912.86,3150.36) 2912.86,3090 ; 2912.86,3090 ccw(c2912.86,3029.64) 2870.18,3072.32 cw(c2912.86,3029.64) 2912.86,3090 ; 3100,3205.72 cw(c3148.28,3205.72) 3114.14,3239.86 ccw(c3148.28,3205.72) 3100,3205.72 ; 3100,3205.72 ccw(c3051.72,3205.72) 3085.86,3239.86 cw(c3051.72,3205.72) 3100,3205.72
SI: inputs1.8 U1.29 | length 1685.9
  Top Layer w10: U1.29@3571.42,3160.47 3622.4,3160.47 3645.76,3137.11 3645.76,3002.76 v2(3646,3003) ; v2@3631.86,3017.14 ccw(c3598.3,3050.7) 3645.76,3050.7 ; 3645.76,3051.87 ccw(c3694.87,3051.87) v2@3660.14,3017.14
  Bottom Layer w10: inputs1.8@2745,3090 2796,3039 3160,3039 3196,3003 v2(3646,3003) ; 3597.72,3003 cw(c3597.72,2954.72) 3631.86,2988.86 ccw(c3597.72,2954.72) 3597.72,3003 ; 3597.72,3003 ccw(c3597.72,3051.28) 3631.86,3017.14 cw(c3597.72,3051.28) 3597.72,3003 ; inputs1.8@2750,3062.5 cw(c2750,3008.18) 2788.41,3046.59 ccw(c2750,3008.18) inputs1.8@2750,3062.5 ; inputs1.8@2750,3072.5 cw(c2750,3042.32) 2771.34,3063.66 ccw(c2750,3042.32) inputs1.8@2750,3072.5 ; inputs1.8@2767.4,3088.17 ccw(c2806.41,3084.06) 2778.68,3056.32 cw(c2806.41,3084.06) inputs1.8@2767.4,3088.17 ; inputs1.8@2777.35,3087.12 ccw(c2833.23,3081.24) 2793.5,3041.5 cw(c2833.23,3081.24) inputs1.8@2777.35,3087.12
SO: inputs1.6 U1.30 | length 1813.4
  Top Layer w10: U1.30@3571.42,3180.16 3629.58,3180.16 3686,3123.74 v2(3686,3110) ccw(c3652.83,3110) 3676.28,3133.46 ; 3659.21,3150.53 cw(c3618.69,3110) v2@3676,3110 ; 3675.31,3134.43 ccw(c3686,3145.11) v2@3686,3130
  Bottom Layer w10: inputs1.6@2755,2988 2801,2942 2910,2942 2986,3018 3154.13,3018 3190.13,2982 3584,2982 3602,2964 3669,2964 3685,2980 3685,3109 v2(3686,3110) ; v2@3671.86,3095.86 cw(c3640.13,3064.13) 3685,3064.13 ; 3685,3059.3 cw(c3736.7,3059.3) v2@3700.14,3095.86 ; 3685,3083.44 cw(c3712.56,3083.44) v2@3693.07,3102.93 ; inputs1.6@2750,2962.5 cw(c2750,2888.87) 2802.07,2940.93 ccw(c2750,2888.87) inputs1.6@2750,2962.5 ; inputs1.6@2750,2972.5 cw(c2750,2923.01) 2785,2958 ccw(c2750,2923.01) inputs1.6@2750,2972.5 ; inputs1.6@2767.5,2990 ccw(c2802.51,2990) 2777.75,2965.25 cw(c2802.51,2990) inputs1.6@2767.5,2990 ; inputs1.6@2777.5,2990 ccw(c2836.65,2990) 2794.82,2948.18 cw(c2836.65,2990) inputs1.6@2777.5,2990
VAMP: C1.1 C3.1 L1.2 U2.12 U2.13 | length 1418.6
  Top Layer w20: U2.12@4479.49,2970 4570,2970 4590,2990 4590,3020 ; U2.13@4479.49,3020 4590,3020 ; v2(4590,3080) 4590,3020 ; 4590,3043.79 cw(c4626.21,3043.79) 4600.61,3069.39 ccw(c4626.21,3043.79) 4590,3043.79 ; 4590,3043.79 ccw(c4553.79,3043.79) 4579.39,3069.39 cw(c4553.79,3043.79) 4590,3043.79
  Bottom Layer w30: v2(4590,3080) C1.1@4690,3080 4690,3035 4715,3010 C3.1@4885,3010 ; C3.1@4828.91,2976.41 ccw(c4747.82,2895.32) 4747.82,3010 ccw(c4747.82,3124.68) C3.1@4828.91,3043.59 ; 4626.21,3080 cw(c4626.21,3116.21) 4600.61,3090.61 ccw(c4626.21,3116.21) 4626.21,3080 ; 4626.21,3080 ccw(c4626.21,3043.79) 4600.61,3069.39 cw(c4626.21,3043.79) 4626.21,3080 ; 4653.79,3080 cw(c4653.79,3043.79) C1.1@4679.39,3069.39 ; 4653.79,3080 ccw(c4653.79,3116.21) 4679.39,3090.61 cw(c4653.79,3116.21) 4653.79,3080 ; 4653.79,3080 cw(c4653.79,3043.79) C1.1@4679.39,3069.39 ; C1.1@4679.39,3069.39 cw(c4653.79,3043.79) 4690,3043.79 ; C1.1@4679.39,3069.39 cw(c4653.79,3043.79) 4690,3043.79 ; C1.1@4679.39,3069.39 cw(c4653.79,3043.79) 4690,3043.79 ; C1.1@4679.39,3069.39 cw(c4653.79,3043.79) 4690,3043.79 ; 4690,3043.79 cw(c4726.21,3043.79) C1.1@4700.61,3069.39 ; 4690,3043.79 cw(c4726.21,3043.79) C1.1@4700.61,3069.39 ; 4690,3043.79 cw(c4726.21,3043.79) C1.1@4700.61,3069.39 ; 4690,3043.79 cw(c4726.21,3043.79) C1.1@4700.61,3069.39
pads on no net: inputs1.1 inputs1.2 inputs1.3 inputs1.4 inputs1.12 inputs1.13 inputs1.14 inputs1.15 inputs1.16 inputs1.18 Microhpone.6 Microhpone.R SPEAKER.6 U1.9 U1.10 U1.11 U1.12 U1.15 U1.25 U1.27 U1.35 U1.36

## Polygon pours and split planes (outlines as drawn)
GND on Top Layer "BottomLayer-No Net" (solid, remove dead copper, pour order 1000): 5199,4023.04 2653.01,4023.04 2647,4029 2647,4026.02 2647,2594.95 2654.01,2588 2657.02,2590.98 5199,2590.98
GND on Bottom Layer "BottomLayer-No Net" (solid, remove dead copper, pour order 1001): 5230,4036.02 5227.02,4039 2635,4039 2635,2600.93 2643.95,2592 5196.18,2592 5221.05,2616.81 5211.1,2616.81

## Keep-outs
Keep-Out Layer:
  the board outline again, w5

## Other copper
Top Layer:
  text "Naminic.com" at 5157,2929 h60 r90

## Silkscreen, mask and mechanical layers (free items; w line width, h text height)
Top Overlay:
  text "NAMINIC.COM" at 2968,3418 h60 r90
  text "MP3 PLAYER MODULE" at 2970,2650 h60

## Text inside footprints (layer, text, board x,y; h text height)
C3: Bottom Overlay "+" at 4835,3000 h30
inputs1: Top Overlay "24" at 2692.74,3951.6 h50; Top Overlay "23" at 2820.97,3948.02 h50; Top Overlay "2" at 2770,2700 h50 r90; Top Overlay "1" at 2870,2715 h50 r90